# EAGLE board OpenAGBoardPart2 (EAGLE 7.5.0)
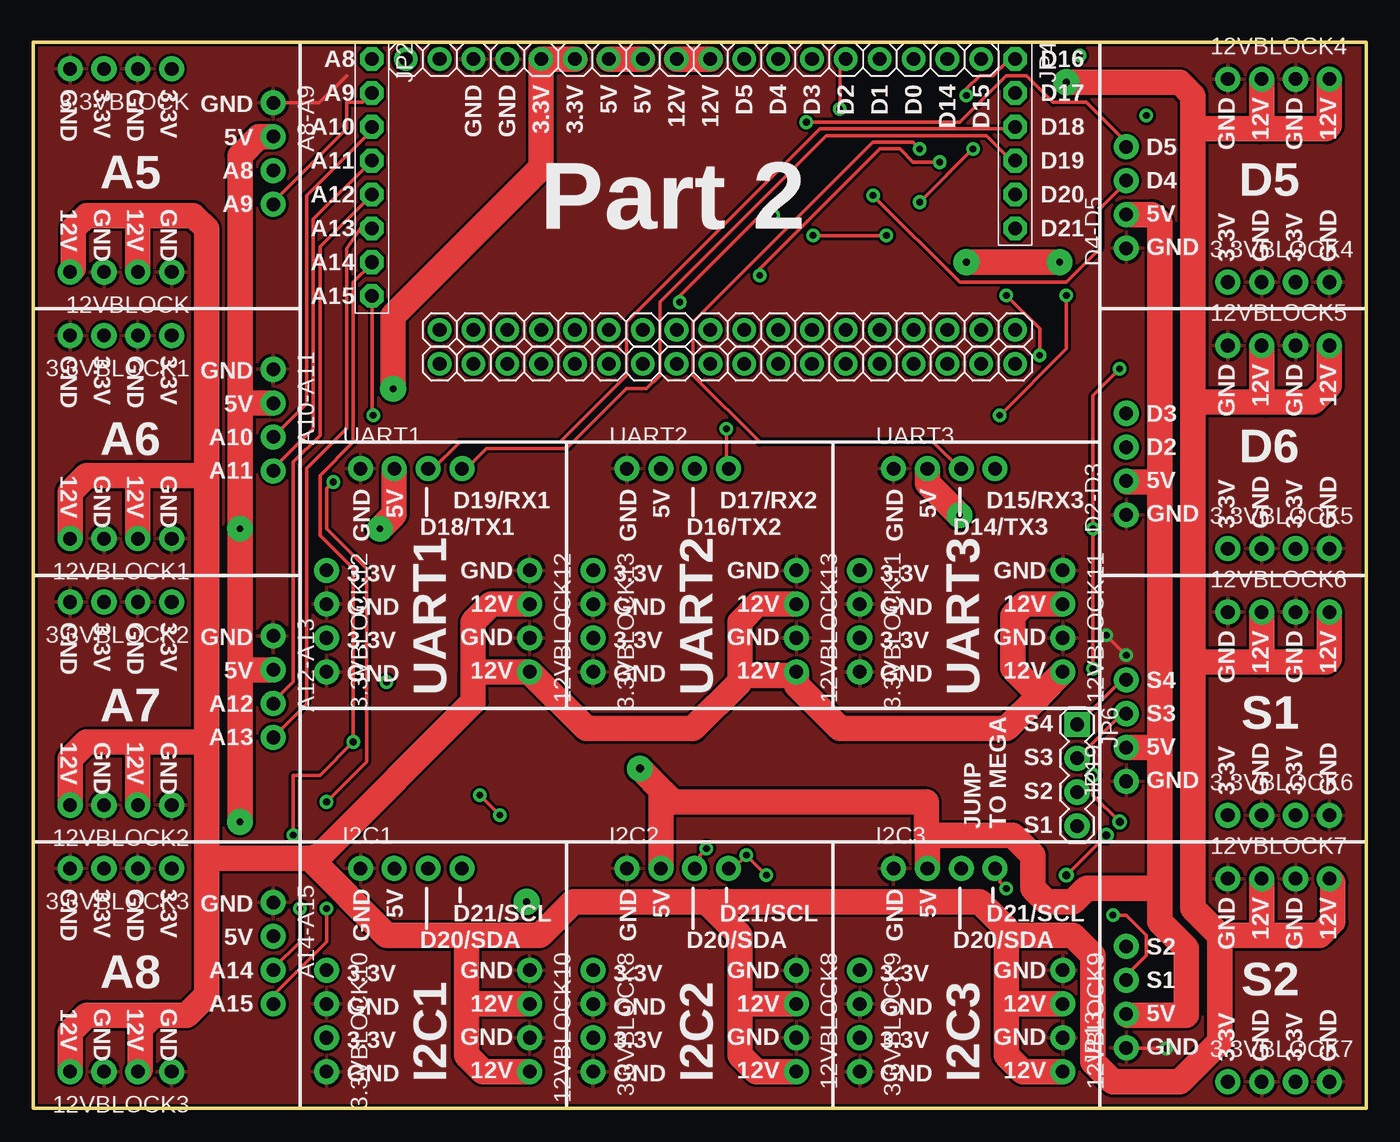
[diagram p0: board, top side]
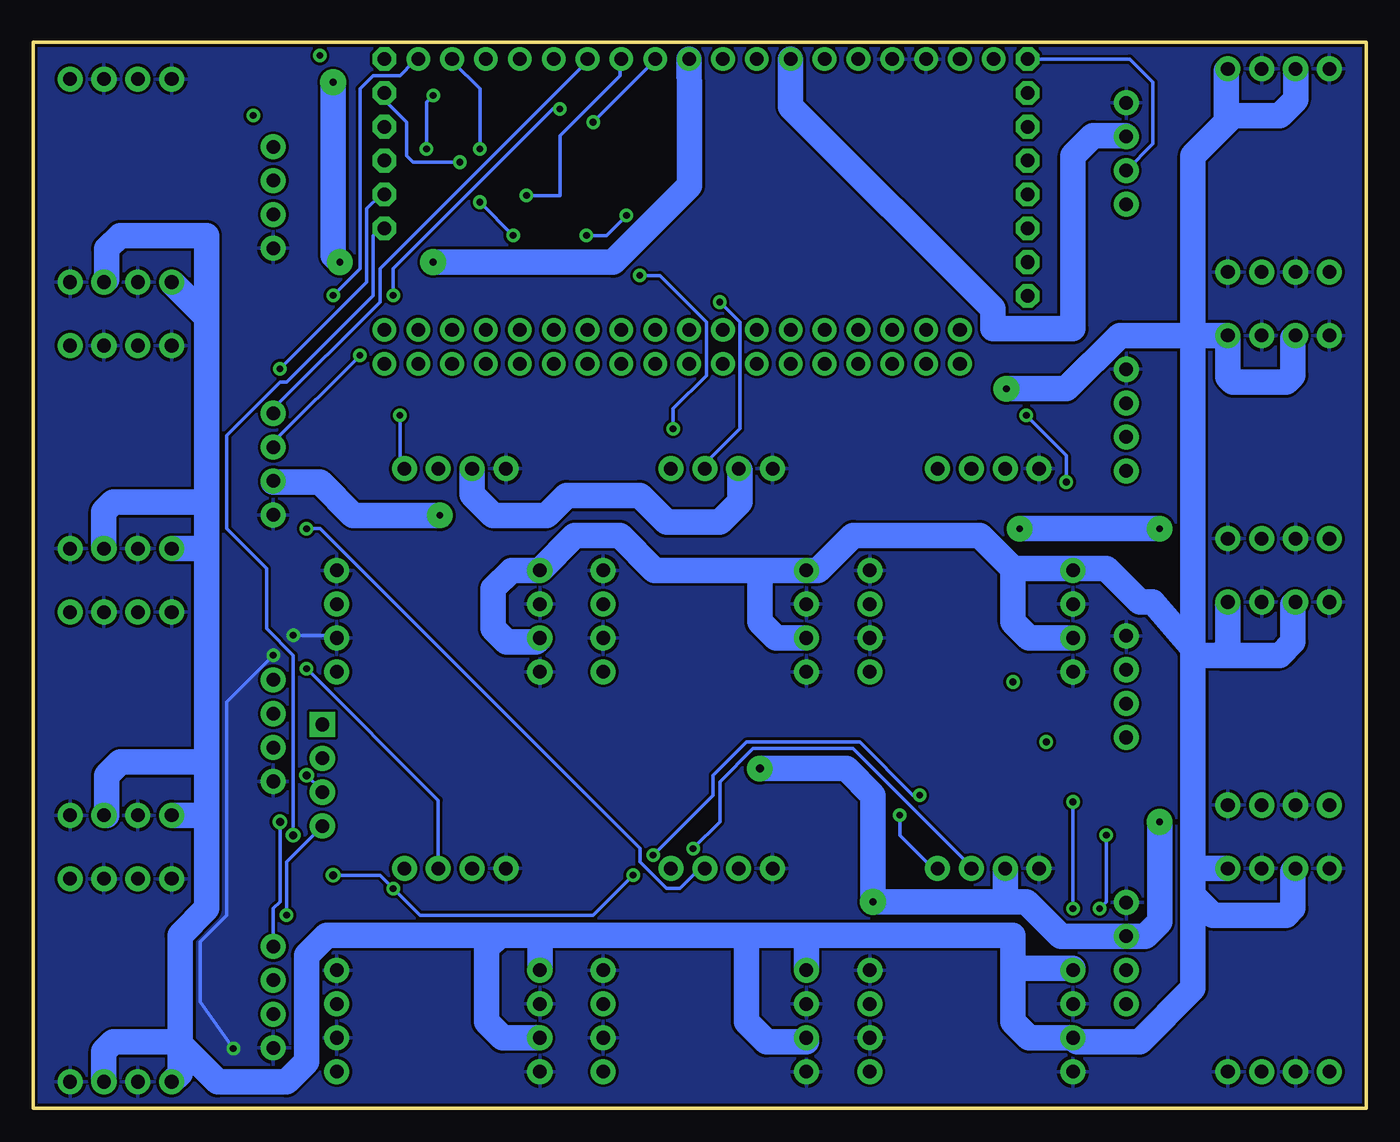
[diagram p1: board, bottom side, seen from below]

Size 100 x 80 mm. Coordinates in mm from the lower left corner, seen from the top.
Outline: 0,0 100,0 100,80 0,80 0,0
Copper layers (1*16): Top 0.035mm / dielectric 1.5mm / Bottom 0.035mm
Design rules "SparkFun *": minimum track width 8mil, minimum drill 20mil, track to track 8mil, track to pad 8mil, pad to pad 8mil, via to via 8mil, smd to smd 8mil, copper to edge 8mil, drill to drill 8mil, minimum pad ring 12mil, minimum via ring 10mil, stop-mask expansion 4mil, vias tented up to drill 20mil, thermal gap 10mil

## Footprints (pad centres in the part's own frame; a part is rotated, then mirrored left to right if it is on the bottom)
1X04_NO_SILK_ALL_ROUND = drill 1.016 pad 1.88: 1 0,0; 2 2.54,0; 3 5.08,0; 4 7.62,0
1X18-BIG = drill 1.016 pad 1.778: 1 -21.59,0; 2 -19.05,0; 3 -16.51,0; 4 -13.97,0; 5 -11.43,0; 6 -8.89,0; 7 -6.35,0; 8 -3.81,0; 9 -1.27,0; 10 1.27,0; 11 3.81,0; 12 6.35,0; 13 8.89,0; 14 11.43,0; 15 13.97,0; 16 16.51,0; 17 19.05,0; 18 21.59,0
1X08-BIG = drill 1.016 pad 1.778 octagon: 1 -8.89,0; 2 -6.35,0; 3 -3.81,0; 4 -1.27,0; 5 1.27,0; 6 3.81,0; 7 6.35,0; 8 8.89,0
1X06-BIG = drill 1.016 pad 1.778 octagon: 1 -6.35,0; 2 -3.81,0; 3 -1.27,0; 4 1.27,0; 5 3.81,0; 6 6.35,0
1X04 = drill 1.016 pad 1.88 square: 1 0,0 | drill 1.016 pad 1.88: 2 2.54,0; 3 5.08,0; 4 7.62,0

## Placement (x,y rotation side)
3.3VBLOCK  [1X04_NO_SILK_ALL_ROUND]  10.38,78 180 top
3.3VBLOCK1  [1X04_NO_SILK_ALL_ROUND]  10.38,58 180 top
3.3VBLOCK2  [1X04_NO_SILK_ALL_ROUND]  10.38,38 180 top
3.3VBLOCK3  [1X04_NO_SILK_ALL_ROUND]  10.38,18 180 top
3.3VBLOCK4  [1X04_NO_SILK_ALL_ROUND]  89.62,62 0 top
3.3VBLOCK5  [1X04_NO_SILK_ALL_ROUND]  89.62,42 0 top
3.3VBLOCK6  [1X04_NO_SILK_ALL_ROUND]  89.62,22 0 top
3.3VBLOCK7  [1X04_NO_SILK_ALL_ROUND]  89.62,2 0 top
3.3VBLOCK8  [1X04_NO_SILK_ALL_ROUND]  42,10.38 270 top
3.3VBLOCK9  [1X04_NO_SILK_ALL_ROUND]  62,10.38 270 top
3.3VBLOCK10  [1X04_NO_SILK_ALL_ROUND]  22,10.38 270 top
3.3VBLOCK11  [1X04_NO_SILK_ALL_ROUND]  62,40.38 270 top
3.3VBLOCK12  [1X04_NO_SILK_ALL_ROUND]  22,40.38 270 top
3.3VBLOCK13  [1X04_NO_SILK_ALL_ROUND]  42,40.38 270 top
12VBLOCK  [1X04_NO_SILK_ALL_ROUND]  10.38,62.76 180 top
12VBLOCK1  [1X04_NO_SILK_ALL_ROUND]  10.38,42.76 180 top
12VBLOCK2  [1X04_NO_SILK_ALL_ROUND]  10.38,22.76 180 top
12VBLOCK3  [1X04_NO_SILK_ALL_ROUND]  10.38,2.76 180 top
12VBLOCK4  [1X04_NO_SILK_ALL_ROUND]  89.62,77.24 0 top
12VBLOCK5  [1X04_NO_SILK_ALL_ROUND]  89.62,57.24 0 top
12VBLOCK6  [1X04_NO_SILK_ALL_ROUND]  89.62,37.24 0 top
12VBLOCK7  [1X04_NO_SILK_ALL_ROUND]  89.62,17.24 0 top
12VBLOCK8  [1X04_NO_SILK_ALL_ROUND]  57.24,10.38 270 top
12VBLOCK9  [1X04_NO_SILK_ALL_ROUND]  77.24,10.38 270 top
12VBLOCK10  [1X04_NO_SILK_ALL_ROUND]  37.24,10.38 270 top
12VBLOCK11  [1X04_NO_SILK_ALL_ROUND]  77.24,40.38 270 top
12VBLOCK12  [1X04_NO_SILK_ALL_ROUND]  37.24,40.38 270 top
12VBLOCK13  [1X04_NO_SILK_ALL_ROUND]  57.24,40.38 270 top
A8-A9  [1X04_NO_SILK_ALL_ROUND]  18,75.46 270 top
A10-A11  [1X04_NO_SILK_ALL_ROUND]  18,55.46 270 top
A12-A13  [1X04_NO_SILK_ALL_ROUND]  18,35.46 270 top
A14-A15  [1X04_NO_SILK_ALL_ROUND]  18,15.46 270 top
D2-D3  [1X04_NO_SILK_ALL_ROUND]  82,44.54 90 top
D4-D5  [1X04_NO_SILK_ALL_ROUND]  82,64.54 90 top
I2C1  [1X04_NO_SILK_ALL_ROUND]  24.54,18 0 top
I2C2  [1X04_NO_SILK_ALL_ROUND]  44.54,18 0 top
I2C3  [1X04_NO_SILK_ALL_ROUND]  64.54,18 0 top
JP1  [1X18-BIG]  49.53,78.74 0 top
JP2  [1X08-BIG]  25.4,69.85 270 top
JP3  [1X18-BIG]  52.07,58.42 0 top
JP4  [1X06-BIG]  73.66,72.39 270 top
JP5  [1X18-BIG]  52.07,55.88 0 top
JP6  [1X04]  78.31,28.81 270 top
JP13  [1X04_NO_SILK_ALL_ROUND]  82,4.54 90 top
JP19  [1X04_NO_SILK_ALL_ROUND]  82,24.54 90 top
UART1  [1X04_NO_SILK_ALL_ROUND]  24.54,48 0 top
UART2  [1X04_NO_SILK_ALL_ROUND]  44.54,48 0 top
UART3  [1X04_NO_SILK_ALL_ROUND]  64.54,48 0 top

## Library data of the parts
3.3VBLOCK 3.3VBLOCK1-3.3VBLOCK13 12VBLOCK 12VBLOCK1-12VBLOCK13 A8-A9 A10-A11 A12-A13 A14-A15 D2-D3 D4-D5 I2C1-I2C3 JP6 JP13 JP19 UART1-UART3 = SparkFun-Connectors
JP1-JP5 = adafruit

## Nets
3.3V: 3.3VBLOCK1.1 3.3VBLOCK1.3 3.3VBLOCK2.1 3.3VBLOCK2.3 3.3VBLOCK3.1 3.3VBLOCK3.3 3.3VBLOCK4.1 3.3VBLOCK4.3 3.3VBLOCK5.1 3.3VBLOCK5.3 3.3VBLOCK6.1 3.3VBLOCK6.3 3.3VBLOCK7.1 3.3VBLOCK7.3 3.3VBLOCK8.1 3.3VBLOCK8.3 3.3VBLOCK9.1 3.3VBLOCK9.3 3.3VBLOCK10.1 3.3VBLOCK10.3 3.3VBLOCK11.1 3.3VBLOCK11.3 3.3VBLOCK12.1 3.3VBLOCK12.3 3.3VBLOCK13.1 3.3VBLOCK13.3 3.3VBLOCK.1 3.3VBLOCK.3 JP1.5 JP1.6
5V: A8-A9.2 A10-A11.2 A12-A13.2 A14-A15.2 D2-D3.2 D4-D5.2 I2C1.2 I2C2.2 I2C3.2 JP1.7 JP1.8 JP13.2 JP19.2 UART1.2 UART2.2 UART3.2
12V: 12VBLOCK1.2 12VBLOCK1.4 12VBLOCK2.2 12VBLOCK2.4 12VBLOCK3.2 12VBLOCK3.4 12VBLOCK4.2 12VBLOCK4.4 12VBLOCK5.2 12VBLOCK5.4 12VBLOCK6.2 12VBLOCK6.4 12VBLOCK7.2 12VBLOCK7.4 12VBLOCK8.2 12VBLOCK8.4 12VBLOCK9.2 12VBLOCK9.4 12VBLOCK10.2 12VBLOCK10.4 12VBLOCK11.2 12VBLOCK11.4 12VBLOCK12.2 12VBLOCK12.4 12VBLOCK13.2 12VBLOCK13.4 12VBLOCK.2 12VBLOCK.4 JP1.9 JP1.10
A8: A8-A9.3 JP2.1
A9: A8-A9.4 JP2.2
A10: A10-A11.3 JP2.3
A11: A10-A11.4 JP2.4
A12: A12-A13.3 JP2.5
A13: A12-A13.4 JP2.6
A14: A14-A15.3 JP2.7
A15: A14-A15.4 JP2.8
D0: JP1.16
D1: JP1.15
D2: D2-D3.3 JP1.14
D3: D2-D3.4 JP1.13
D4: D4-D5.3 JP1.12
D5: D4-D5.4 JP1.11
D14: JP1.17 UART3.3
D15: JP1.18 UART3.4
D16: JP4.1 UART2.3
D17: JP4.2 UART2.4
D18: JP4.3 UART1.3
D19: JP4.4 UART1.4
D20: I2C1.3 I2C2.3 I2C3.3 JP4.5
D21: I2C1.4 I2C2.4 I2C3.4 JP4.6
GND: 3.3VBLOCK1.2 3.3VBLOCK1.4 3.3VBLOCK2.2 3.3VBLOCK2.4 3.3VBLOCK3.2 3.3VBLOCK3.4 3.3VBLOCK4.2 3.3VBLOCK4.4 3.3VBLOCK5.2 3.3VBLOCK5.4 3.3VBLOCK6.2 3.3VBLOCK6.4 3.3VBLOCK7.2 3.3VBLOCK7.4 3.3VBLOCK8.2 3.3VBLOCK8.4 3.3VBLOCK9.2 3.3VBLOCK9.4 3.3VBLOCK10.2 3.3VBLOCK10.4 3.3VBLOCK11.2 3.3VBLOCK11.4 3.3VBLOCK12.2 3.3VBLOCK12.4 3.3VBLOCK13.2 3.3VBLOCK13.4 3.3VBLOCK.2 3.3VBLOCK.4 12VBLOCK1.1 12VBLOCK1.3 12VBLOCK2.1 12VBLOCK2.3 12VBLOCK3.1 12VBLOCK3.3 12VBLOCK4.1 12VBLOCK4.3 12VBLOCK5.1 12VBLOCK5.3 12VBLOCK6.1 12VBLOCK6.3 12VBLOCK7.1 12VBLOCK7.3 12VBLOCK8.1 12VBLOCK8.3 12VBLOCK9.1 12VBLOCK9.3 12VBLOCK10.1 12VBLOCK10.3 12VBLOCK11.1 12VBLOCK11.3 12VBLOCK12.1 12VBLOCK12.3 12VBLOCK13.1 12VBLOCK13.3 12VBLOCK.1 12VBLOCK.3 A8-A9.1 A10-A11.1 A12-A13.1 A14-A15.1 D2-D3.1 D4-D5.1 I2C1.1 I2C2.1 I2C3.1 JP1.3 JP1.4 JP13.1 JP19.1 UART1.1 UART2.1 UART3.1
N$1: JP1.1
N$2: JP1.2
N$10: JP6.1 JP19.4
N$12: JP6.2 JP19.3
N$15: JP6.3 JP13.4
N$16: JP6.4 JP13.3

## Tracks (layer width: path | path; a pad name or v marks a point on that pad's centre or on a via)
3.3V  (via drill 0.51 pad 1.93)
  Top 1.93: JP1.6 JP1.5 38.1,70.6 27,59.5 v27,54
  Bottom 1.93: 13.5,58 13,58 | 3.3VBLOCK1.3 5.5,57.8 5.5,55 6,54.5 10,54.5 10.38,54.88 3.3VBLOCK1.1 13,58 | 13,58 13,71.5 10.5,74 | 10.5,74 10.5,77.88 3.3VBLOCK.1 | 3.3VBLOCK.3 5.3,75.7 6.5,74.5 10,74.5 10.5,74 | 3.3VBLOCK2.1 10.38,34.62 11,34 | 11,34 13,34 | 13,34.5 13,57.5 13.5,58 | 11,34 6.5,34 5.5,35 5.5,37.8 3.3VBLOCK2.3 | 13,34 13,18 | 13,18 3.3VBLOCK3.1 | 13,18 13,16 | 13,16 11.5,14.5 6,14.5 5.5,15 5.5,17.8 3.3VBLOCK3.3 | 13,34 13,34.5 | 13,34.5 16,38 17,38 19.5,40.5 21.88,40.5 3.3VBLOCK12.1 22.12,40.5 26.5,40.5 | 13,16 13,9 17,5 21.7,5 3.3VBLOCK10.3 25.3,5.3 26.5,6.5 26.5,10.5 | 3.3VBLOCK10.1 22,10.5 26.5,10.5 | 42,13 26.5,13 26.5,10.5 | 42,13 46,13 | 46,13 62,13 | 65,13 78,13 79.5,11.5 79.5,3.5 81,2 86.19,2 89,4.81 | 89,5 89,13 87,15 87,22 | 89,5 89,4.81 | 89,4.81 89,2.62 3.3VBLOCK7.1 | 3.3VBLOCK7.3 94.7,4.3 94,5 89,5 | 3.3VBLOCK9.1 62,13 | 3.3VBLOCK9.3 64.8,5.3 66,6.5 66,12 65,13 | 3.3VBLOCK8.1 42,13 | 3.3VBLOCK8.3 42,5 45,5 46.5,6.5 46.5,12.5 46,13 | 62,13 65,13 | 87,22 87,26 | 87,26 87,42 | 87,42 87,45.5 | 87,45.5 87,59.38 | 87,59.38 3.3VBLOCK4.1 | 87,59.38 87,65.5 93.5,65.5 94.5,64.5 94.5,62.2 3.3VBLOCK4.3 | 3.3VBLOCK5.1 87,42 | 3.3VBLOCK5.3 94.7,44.8 94,45.5 87,45.5 | 3.3VBLOCK6.1 87,22 | 3.3VBLOCK6.3 94.5,22 94.5,25 93.5,26 87,26 | v27,54 22.5,54 18.5,58 13.5,58 | 46,40.38 3.3VBLOCK13.1 41.12,40.38 38.5,43 29,43 26.5,40.5 | 46,40.38 53.38,40.38 56,43 59.38,43 3.3VBLOCK11.1 64.12,40.38 65.5,39 65.5,36 64.5,35 62.3,35 3.3VBLOCK11.3 | 3.3VBLOCK13.3 44.3,35.3 45.5,36.5 45.5,39.88 46,40.38 | 3.3VBLOCK12.3 25.3,35.3 26.5,36.5 26.5,40.5
5V  (via drill 0.51 pad 1.93, 0.6 pad 1.93)
  Top 1.93: A8-A9.2 16.92,72.92 15.5,71.5 15.5,53 | 15.5,53 v15.5,43.5 15.5,33 | 15.5,33 v15.5,21.5 | A10-A11.2 15.58,52.92 15.5,53 | A12-A13.2 15.58,32.92 15.5,33 | JP1.7 JP1.8 | UART1.2 27.08,44.58 v26,43.5 | UART3.2 67.08,46.92 v69.5,44.5 | D4-D5.2 83.92,67.08 84.5,66.5 84.5,47 | 84.5,47 84.5,27.5 | 84.5,27.5 84.5,16.5 | 84.5,16.5 84.5,14 86.5,12 86.5,7 82.08,7 JP13.2 | 84.5,16.5 79,16.5 78,15.5 76,15.5 75,16.5 75,19 73.5,20.5 67.5,20.5 | 67.5,20.5 67,20.5 67,23 48,23 47.25,23.75 | 47.25,23.75 v45.5,25.5 | JP19.2 84.08,27.08 84.5,27.5 | I2C2.2 47.08,23.58 47.25,23.75 | 84.5,47 82.08,47 D2-D3.2 | I2C3.2 67.08,20.08 67.5,20.5
  Bottom 1.93: v15.5,21.5 15.5,14 16.58,12.92 A14-A15.2 22.92,12.92 25.5,15.5 27,15.5 | 27,15.5 v37,15.5 37,23.5 39,25.5 v45.5,25.5 | JP1.7 43.18,75.18 28,60 28,58.5 22,58.5 22,71.5 20.5,73 18.08,73 A8-A9.2 | I2C1.2 27.08,15.58 27,15.5 | v15.5,43.5 v26,43.5 | v69.5,44.5 76,44.5 78.5,47 81.92,47 | 81.92,47 D2-D3.2 | UART3.2 67.08,46.08 65.5,44.5 61.5,44.5 60,46 54.5,46 52.5,44 48.5,44 47,45.5 47,47.92 UART2.2 | 81.92,47 82,47
12V  (via drill 0.51 pad 1.93)
  Top 1.93: JP1.9 JP1.10 | v77.5,77 86,77 87,76 87,73 | 87,73 87,53 | 87,53 87,33.5 | 87,33.5 87,15 89,13 | 89,13 92.5,13 | 92.5,13 96.5,13 97.5,14 97.5,16.98 12VBLOCK7.4 | 12VBLOCK7.2 92.16,13.34 92.5,13 | 12VBLOCK6.4 97.24,33.74 97,33.5 92,33.5 | 92,33.5 87,33.5 | 12VBLOCK6.2 92.16,33.66 92,33.5 | 12VBLOCK5.4 97.24,54.24 96,53 92.5,53 | 92.5,53 87,53 | 12VBLOCK5.2 92.16,53.34 92.5,53 | 12VBLOCK4.4 97.24,73.74 97,73.5 92,73.5 | 92,73.5 87.5,73.5 87,73 | 12VBLOCK4.2 92.16,73.66 92,73.5 | 13,27 13,47.5 | 13,47.5 13,66 12,67 8,67 | 8,67 4,67 3,66 3,63 12VBLOCK.4 | 12VBLOCK.2 7.84,66.84 8,67 | 12VBLOCK1.4 2.76,46.26 4,47.5 8,47.5 | 8,47.5 13,47.5 | 12VBLOCK1.2 7.84,47.34 8,47.5 | 12VBLOCK2.4 2.76,26.26 4,27.5 8,27.5 | 8,27.5 12.5,27.5 13,27 | 20.75,18.75 26.5,13 32.5,13 | 13,27 13,19 | 13,19 13,8.5 11.5,7 9,7 | 9,7 8,6 8,2.92 12VBLOCK3.2 | 12VBLOCK3.4 2.76,5.76 4,7 9,7 | 12VBLOCK9.4 74.24,2.76 73,4 73,8 | 73,8 73,13 | 12VBLOCK9.2 73.16,7.84 73,8 | 12VBLOCK8.4 54.24,2.76 53,4 53,8 | 53,8 53,13 50.75,15.25 | 12VBLOCK8.2 53.16,7.84 53,8 | 12VBLOCK10.4 33.74,2.76 32.5,4 32.5,8 | 32.5,8 32.5,13 | 12VBLOCK10.2 32.66,7.84 32.5,8 | 12VBLOCK2.2 7.84,27.34 8,27.5 | 33,32.76 12VBLOCK12.4 41.5,28.5 49.5,28.5 53,32 53,32.5 | 12VBLOCK12.2 34.34,37.84 33,36.5 33,32.76 | 12VBLOCK13.2 54.34,37.84 53,36.5 53,32.5 | 53,32.5 56.98,32.5 12VBLOCK13.4 57.24,31.76 60.5,28.5 73,28.5 75.5,31 | 12VBLOCK11.4 77.24,32.74 75.5,31 | 12VBLOCK11.2 74.34,37.84 73.5,37 73.5,33 75.5,31 | 20.75,18.75 13.25,18.75 13,19 | 20.75,18.75 21.5,19 33,30.5 33,32.76 | 89,13 89,5 86,2 81,2 79.5,3.5 79.5,11.5 78,13 73,13 | v70,63.5 v77,63.5 | 32.5,13 38,13 40.5,15.5 50.5,15.5 50.75,15.25 | 73,13 73,13.5 71,15.5 51,15.5 50.75,15.25
  Bottom 1.93: JP1.10 50.76,75.74 50.76,69.24 56.5,63.5 v70,63.5 | v77.5,77 77.5,64 v77,63.5
A8
  Bottom 0.254: JP2.1 17.74,78.74 16,77 16,72.38 A8-A9.3
A9
  Top 0.254: A8-A9.4 18,68 23.5,73.5 23.5,75.5 24.7,75.5 JP2.2
A10
  Top 0.254: JP2.3 25.4,73.4 20.5,68.5 20.5,52.88 A10-A11.3
A11
  Top 0.254: A10-A11.4 18,48 21,51 21,66.72 JP2.4
A12
  Top 0.254: A12-A13.3 18,30.5 19.5,32 19.5,48.5 21.5,50.5 21.5,64.68 JP2.5
A13
  Top 0.254: JP2.6 24.54,66.04 23.5,64.5 23.5,51 20.5,48 20.5,30.34 A12-A13.4
A14  (via drill 0.51)
  Top 0.254: JP2.7 25.4,63.4 24,62 24,50 21.5,47.5 21.5,43 24,40.5 v24,27.5 21.5,25 19.5,25 v19.5,20.5 | v20,15 20,12.5 18,10.5 A14-A15.3
  Bottom 0.254: v19.5,20.5 19.5,15.5 v20,15
A15  (via drill 0.51)
  Top 0.254: JP2.8 25.4,52.1 v25.5,52 | v22.5,47 22,46.5 22,43.5 25,40.5 25,26 v22,23 | v22,15 22,12.5 18,8.5 A14-A15.4
  Bottom 0.254: v22.5,47 22.5,49 v25.5,52 | v22,15 v22,23
D2  (via drill 0.51)
  Top 0.254: v75.5,56.5 75.5,58.5 v73,61 | v60.5,75 60.5,78.5 JP1.14
  Bottom 0.254: v75.5,56.5 82,50 D2-D3.3 | v73,61 73,63 61,75 v60.5,75
D3
  Bottom 0.254: JP1.13 58.5,78.5 74,63 74,60.5 82,52.5 D2-D3.4
D4  (via drill 0.51)
  Top 0.254: v63,68.5 69.5,62 77.5,62 80,64.5 80,67.5 82,69.5 D4-D5.3
  Bottom 0.254: v63,68.5 60.5,68.5 60.5,73 56,77.5 56,78.5 JP1.12
D5  (via drill 0.51)
  Top 0.254: v58,74 69.5,74 73,77.5 74.5,77.5 76.5,75.5 79,75.5 82,72.5 D4-D5.4
  Bottom 0.254: v58,74 53.5,78.5 JP1.11
D14  (via drill 0.51)
  Top 0.254: v66.5,72 66,72.5 63,72.5 49.5,59 49.5,55 54.5,50 67.5,50 69.5,48 UART3.3
  Bottom 0.254: v66.5,72 66.5,76.5 68.5,78.5 JP1.17
D15  (via drill 0.51)
  Top 0.254: v72.5,52 77.5,57 v77.5,61
  Bottom 0.254: v72.5,52 72.5,48 UART3.4 | v77.5,61 75.5,63 75.5,76.5 74.5,77.5 72.5,77.5 71.5,78.5 JP1.18
D16  (via drill 0.51 pad 0.25)
  Top 0.254: v58.5,65.5 v64,65.5 | v55.5,67 54.5,67 48.5,61 v48.5,60.5 | v66.5,68 v70.5,72 | v70,76 70,76.5 71,77.5 72,77.5 73.24,78.74 JP4.1
  Bottom 0.254: v58.5,65.5 57,65.5 v55.5,67 | v48.5,60.5 47,59 47,51 50,48 UART2.3 | v64,65.5 v66.5,68 | v70.5,72 70.5,75.5 v70,76
D17  (via drill 0.51)
  Top 0.254: v52,51 52,48 UART2.4 | v54.5,62.5 54.5,63 63.5,72 65,72 66,71 v68,71
  Bottom 0.254: v52,51 52,52.5 49.5,55 49.5,59 53,62.5 v54.5,62.5 | JP4.2 73.66,75.66 72,74 72,71.5 71.5,71 v68,71
D18
  Top 0.254: JP4.3 73.5,73.5 59,73.5 44.5,59 44.5,55 39.5,50 32,50 30,48 UART1.3
D19
  Top 0.254: UART1.4 32.5,48 34,49.5 40,49.5 44.5,54 46,54 47,55 47,60.5 59.5,73 71.5,73 73.5,71 JP4.4
D20  (via drill 0.51, 0.51 pad 0.25)
  Top 0.254: v81.5,55.5 79.5,53.5 v79.5,43.5 v79.5,33 | v50.5,19.5 50,19 50,18 I2C2.3
  Bottom 0.254: v81.5,55.5 75,62 75,67.5 74,68.5 JP4.5 | I2C3.3 69.62,23.12 v79.5,33 | v50.5,19.5 48.5,21.5 48.5,24.5 46,27 38.5,27 29.5,18 I2C1.3 | v79.5,43.5 78.5,43.5 54.5,19.5 54.5,18.5 52.5,16.5 51.5,16.5 50,18 I2C2.3
D21  (via drill 0.51, 0.6 pad 0.25)
  Top 0.254: v35,22 v33.5,23.5 | I2C2.4 52.5,18 v53.5,19 v55,17.5 | v73,16.5 72.5,17 72.5,18 I2C3.4 | v77.5,17.5 v80.5,20.5
  Bottom 0.254: JP4.6 74,66 74.5,65.5 74.5,61 81,54.5 81.5,54.5 85.5,50.5 85.5,43.5 82.5,40.5 82.5,36 80.5,34 v80.5,20.5 | v53.5,19 49,23.5 49,25 46.5,27.5 38,27.5 34,23.5 v33.5,23.5 | v35,22 35,20.5 32.5,18 I2C1.4 | v55,17.5 58,14.5 71,14.5 v73,16.5 74,17.5 v77.5,17.5
GND  (via drill 0.51)
  Top 0.254: 3.3VBLOCK8.2 42.16,7.84 | A8-A9.1 21.46,75.46 23.5,77.5 | v85,4.5 82.5,4.5 JP13.1 | v80.5,35.5 v82,34
  Bottom 0.254: v85,4.5 87.5,8 87.5,12.5 85.5,14.5 85.5,30.5 v82,34 | v80.5,35.5 77.5,35.5 12VBLOCK11.3
  pour Bottom: 0,0 100,0 100,80 0,80
  pour Top: 0,0 100,0 100,80 0,80
N$6  (via drill 0.51)
  other vias: 26.5,32
N$8  (via drill 0.51)
  other vias: 78.5,79
N$9  (via drill 0.51)
  other vias: 83.5,74.5
N$10
  Top 0.254: JP19.4 81.66,32.16 JP6.1
N$12
  Top 0.254: JP19.3 81.66,29.62 JP6.2
N$15  (via drill 0.6 pad 0.25)
  Top 0.254: v79.5,25 79.5,23.5 v81.5,21.5
  Bottom 0.254: v79.5,25 78.5,24 JP6.3 | v81.5,21.5 81.5,15.5 82,15 JP13.4
N$16  (via drill 0.51)
  Top 0.254: v81,14.5 82,14.5 83.5,13 83.5,11.5 82,10 JP13.3
  Bottom 0.254: v81,14.5 81,18.5 78.5,21 JP6.4

## Text on the board
tPlace: A8 | D16 | A9 | GND | GND | 3.3V | 3.3V | 5V | 5V | 12V | 12V | D5 | D4 | D3 | D2 | D1 | D0 | D14 | D15 | GND | 3.3V | GND | 3.3V | GND | D17 | GND | 12V | GND | 12V | 5V | A10 | D18 | A11 | D5 | A8 | D5 | D19 | A5 | A12 | D4 | 12V | GND | 12V | GND | A9 | D20 | A13 | Part 2 | 5V | D21 | A14 | GND | 3.3V | GND | 3.3V | GND | A15 | GND | 3.3V | GND | 3.3V | GND | GND | 12V | GND | 12V | 5V | D3 | A10 | D6 | A6 | D2 | 12V | GND | 12V | GND | A11 | GND | 5V | GND | 5V | GND | 5V | 5V | D19/RX1 | D17/RX2 | D15/RX3 | GND | D18/TX1 | D16/TX2 | D14/TX3 | 3.3V | GND | 3.3V | GND | GND | GND | GND | 3.3V | 3.3V | 3.3V | 12V | 12V | 12V | GND | GND | GND | GND | 3.3V | GND | 3.3V | GND | GND | GND | GND | GND | 12V | GND | 12V | 5V | 3.3V | 12V | 3.3V | 12V | 3.3V | 12V | GND | GND | GND | S4 | A12 | UART1 | UART2 | UART3 | S1 | A7 | S3 | 12V | GND | 12V | GND | A13 | S4 | S3 | 5V | GND | S2 | 3.3V | GND | 3.3V | GND | JUMP / TO MEGA | S1 | GND | 3.3V | GND | 3.3V | GND | GND | 5V | GND | 5V | GND | 5V | GND | 12V | GND | 12V | 5V | D21/SCL | D21/SCL | D21/SCL | D20/SDA | D20/SDA | D20/SDA | S2 | A14 | GND | GND | GND | S2 | 3.3V | 3.3V | 3.3V | A8 | S1 | 12V | GND | 12V | GND | A15 | 12V | 12V | 12V | GND | GND | GND | GND | GND | GND | 5V | 3.3V | 12V | 3.3V | 12V | 3.3V | 12V | GND | 3.3V | GND | 3.3V | GND | GND | I2C1 | GND | I2C2 | GND | I2C3